# Altium PCB Current Sensor.PcbDoc
Units mil, origin at the board's own origin, x right, y up, seen from the top; angles counter-clockwise.
Board outline 1010 x 690 mil, 2 copper layers (Top Layer, Bottom Layer); 10 components, 8 nets, 30 pads, 8 vias.
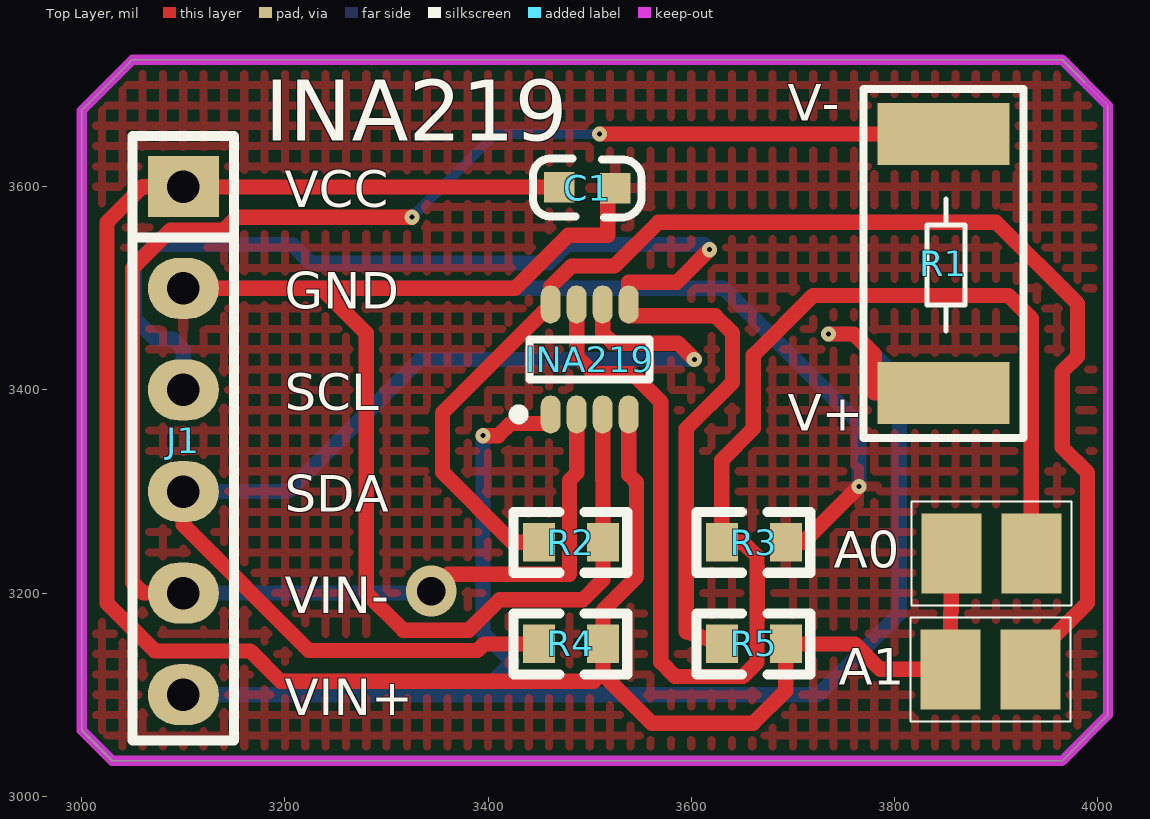
[diagram p0: Top Layer view]
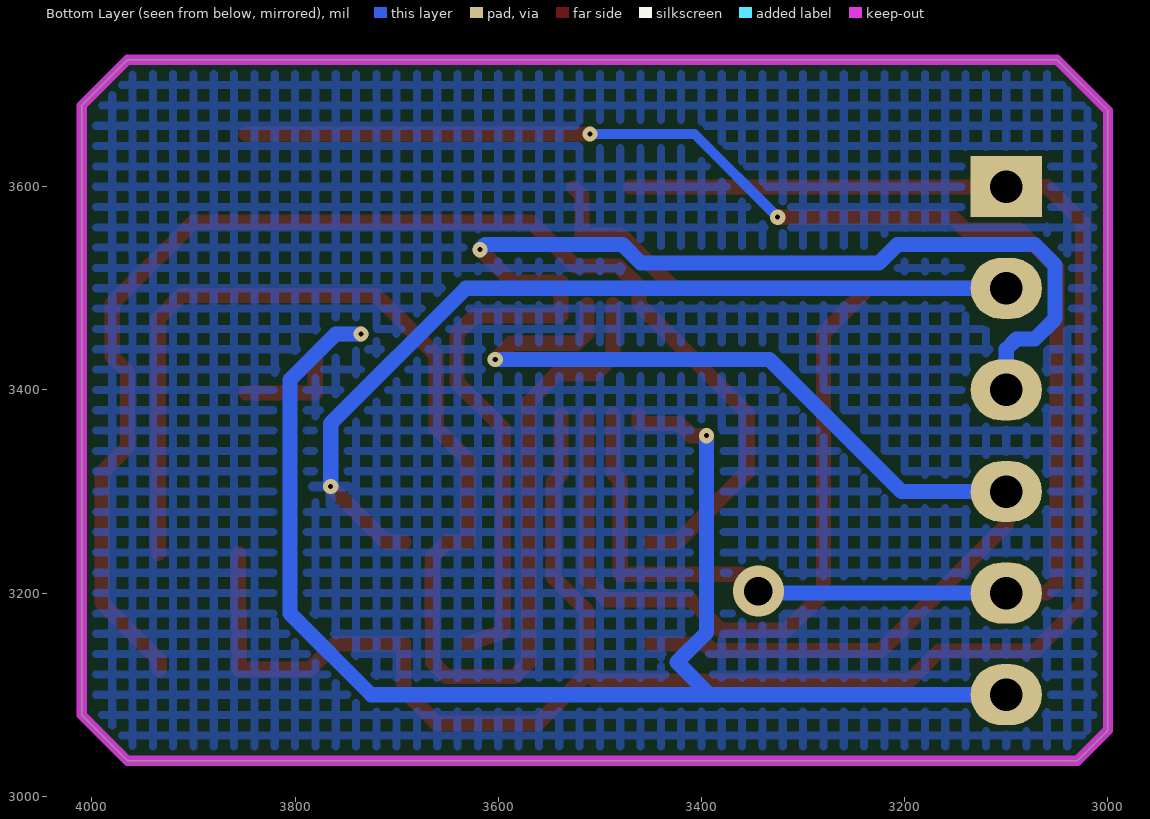
[diagram p1: Bottom Layer view, seen from below]
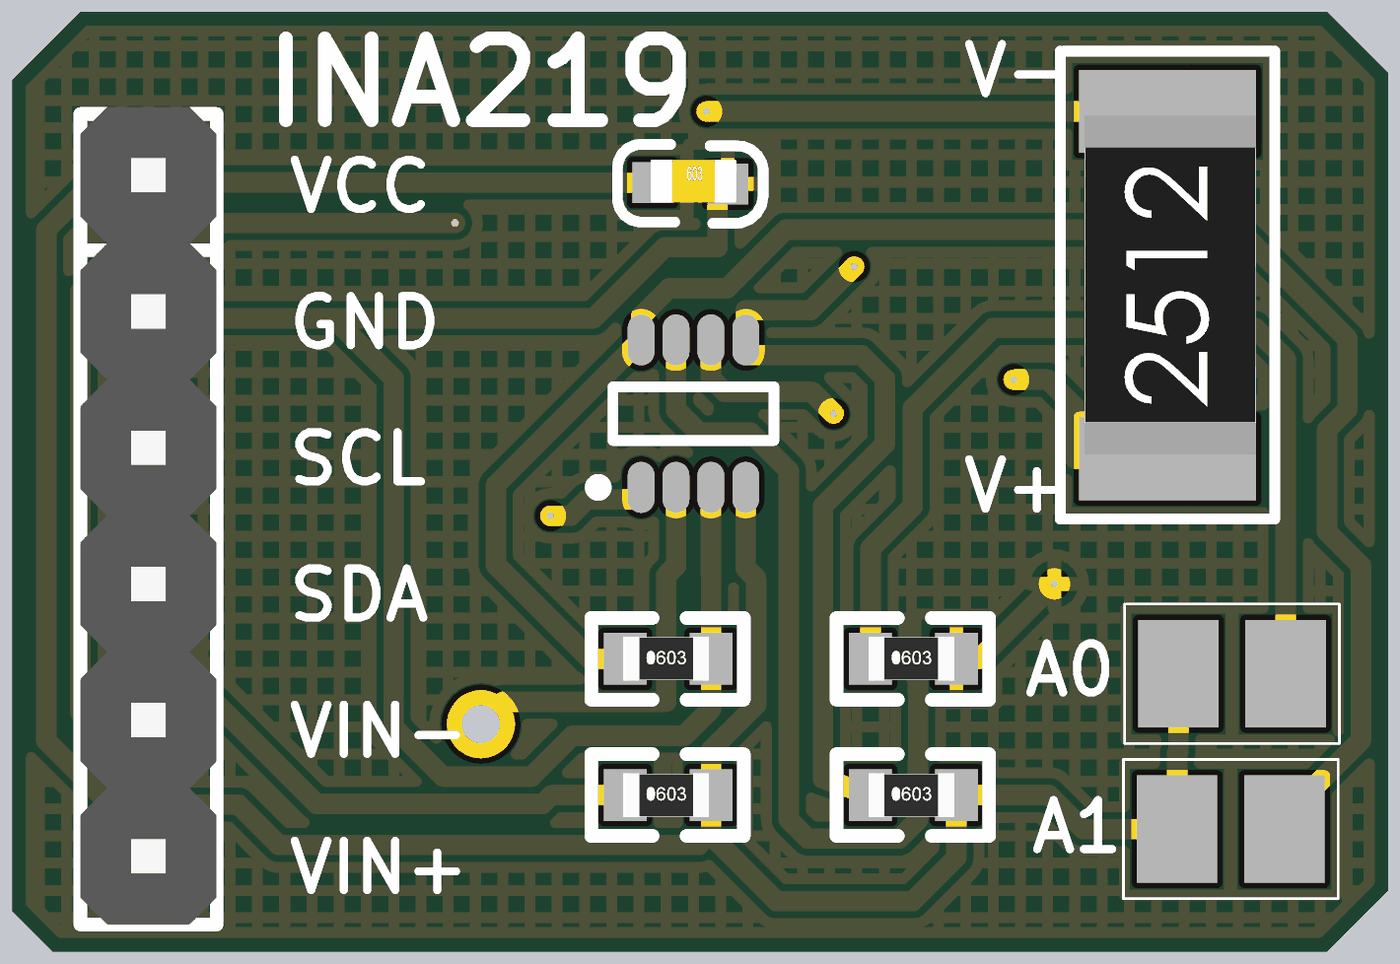
[diagram p2: 3D render of the assembled board from above, using the file's embedded part models]

## Layer stack, top to bottom
Top Solder: solder mask 0.4, Solder Resist, Dk 3.5
Top Layer: signal copper 1.4
Dielectric 1: dielectric 12.6, FR-4, Dk 4.8
Bottom Layer: signal copper 1.4
Bottom Solder: solder mask 0.4, Solder Resist, Dk 3.5

## Board outline
3030,3035 3000,3065 3000,3675 3050,3725 3965,3725 4010,3680 4010,3080 3965,3035

## Design rules (kind name [scope] priority, off if disabled: settings)
Clearance [All] p1: gap=5
PolygonConnect [All] p1: connectstyle=Relief reliefconductorwidth=10 reliefentries=4 polygonreliefangle="90 Angle" airgapwidth=10
RoutingVias [All] p1: holewidth=28 width=50 viastyle="Through Hole" minholewidth=28 minwidth=50 maxholewidth=28 maxwidth=50
SolderMaskExpansion [All] p1: expansion=4
Width [All] p1: maxlimit=25 minlimit=5 preferedwidth=15
30 further rules are at their usual default settings.

## Components (designator, comment, footprint, x,y, rotation, side; value= is the part's Value field where it differs from the comment)
A0 "Switch_0" TSOP65P180X145-2N 3895.31,3239 r0 top
A1 "Switch_1" TSOP65P180X145-2N 3894.37,3125 r0 top
C1 "CAP1uF" 0603C 3470,3600 r0 top
INA219 "INA219" INA219 3500,3430 r90 top
J1 "Pin HDR1X6" "Pin HDR1X6/2.54mm-S" 3100,3600 r0 top
R1 "RES0.1" 2512R 3850,3400 r90 top
R2 "RES10k" 0603R 3450,3250 r0 top
R3 "RES10k" 0603R 3630,3250 r0 top
R4 "RES10k" 0603R 3450,3150 r0 top
R5 "RES10k" 0603R 3630,3150 r0 top

## Footprints (in the part's own frame and the unit in brackets; to place one, negate y for a bottom-side part, rotate by r counter-clockwise, add the part's x,y. Pads: shape width x height; smd on the part's side, far side on the other; paste and mask are expansions set on the pad)
0603C [mil]
  rect 30x30 smd: 1(0.21,-0.35) 2(55.21,-1.35)
  silkscreen extent -26,-30 81,28, body extent -1,-15 62,17, height 12
0603R [mm]
  rect 0.8x0.965 smd: 1(0,0) 2(1.6,0)
  silkscreen extent -0.64,-0.76 2.21,0.76, body extent -0.04,-0.41 1.56,0.41, height 0.45
2512R [mil]
  rect 61x129.92 smd: 1(-3.11,2) 2(251.89,2)
  silkscreen extent -47,-77 296,81, body extent 0,-63 249,63, height 24
INA219 [mm] "TSOP, 8-Leads, Body 2.90x1.60mm, Pitch 0.65mm, IPC Medium Density"
  oval 0.95x0.5 smd: 1(-1.375,0.975) 2(-1.375,0.325) 3(-1.375,-0.325) 4(-1.375,-0.975) 5(1.375,-0.975) 6(1.375,-0.325) 7(1.375,0.325) 8(1.375,0.975)
  silkscreen extent -1.5,-1.5 0.5,1.9, body extent -0.9,-1.5 0.9,1.5, height 1.45
"Pin HDR1X6/2.54mm-S" [mil]
  rect 70x60 hole 32: 1(0,0)
  oval 70x60 hole 32: 2(0,-100) 3(0,-200) 4(0,-300) 5(0,-400) 6(0,-500)
  silkscreen extent -50,-545 50,50, body extent -50,-545 50,55, height 336
TSOP65P180X145-2N [mm] "TSOP, 2-Leads, Body 1.00x0.15mm, Pitch 0.65mm, IPC Medium Density"
  rect 1.5x2 smd: 1(-1,0) 2(1,0)
  silkscreen extent -2,-1.3 2,1.3

## Part data
A0 A1: library part Component_1
C1: library part CAP, "无极性电容"
R1 R2 R3 R4 R5: library part RES

## Via types
v1: diameter 15, hole 5, Top Layer to Bottom Layer, 6 vias
v2: diameter 15, hole 5, Top Layer to Bottom Layer, tented both sides, 1 vias
v3: diameter 50, hole 28, Top Layer to Bottom Layer, 1 vias

## Nets (pads, with @x,y where several pads share a name; then routed paths per layer and width w, separated by ;. In a path a pad name is that pad's centre, name@x,y a point inside that pad or via, vN(x,y) a via of type N, cw(c..) or ccw(c..) an arc to the next point about the centre after c; other vN are vias at no path point)
A0: A0.2 INA219.7 R3.1 | length 1395.7
  Top Layer w15: INA219.7 3487.2,3432.8 3504,3416 3542,3416 3570,3388 3570,3132 3584,3118 3651,3118 3664.74,3131.74 3664.74,3174.17 3665,3174.43 3665,3225.57 3664.74,3225.83 3664.74,3236.26 3651,3250 R3.1 3630,3331 3661,3362 3661,3434.03 3719.86,3492.9 3912.1,3492.9 3934.69,3470.31 A0.2
A1: A1.2 INA219.8 R2.1 | length 1328
  Top Layer w15: R2.1 3424,3250 3355,3319 3355,3377.52 INA219.8 3461.61,3501.61 3482,3522 3524.5,3522 3567.5,3565 3900,3565 3980,3485 3980,3432.86 3965,3417.86 3965,3343.58 3990,3318.58 3990,3190.26 3933.74,3134 A1.2
GND: C1.2 INA219.3 J1.2 R2.2 R3.2 | length 2115.4
  Top Layer w15: J1.2 3236,3500 ; INA219.3 3512.8,3312.2 3512.99,3312 R2.2 3512.99,3213.25 3493.25,3193.5 3411.08,3193.5 3381.08,3163.5 3316.5,3163.5 3280,3200 3280,3456 3236,3500 ; C1.2 3517.71,3591.15 3517.71,3552.15 3478.71,3552.15 3426.57,3500 3236,3500 ; R3.2 3710,3250 v1(3765,3305)
  Bottom Layer w15: J1.2 3632,3500 3765,3367 v1(3765,3305)
SCL: INA219.5 J1.3 R5.1 | length 1329.6
  Top Layer w15: v1(3618,3538) 3586,3506 3538.39,3506 INA219.5 3538.39,3472.93 3623.57,3472.93 3640.5,3456 3640.5,3407.5 3595,3362 3595,3162.07 R5.1
  Bottom Layer w15: J1.3 3100,3440 3090,3450 3072,3450 3052,3470 3052,3523 3072,3543 3207.25,3543 3225.25,3525 3459.75,3525 3477.75,3543 3613,3543 v1(3618,3538)
SDA: INA219.6 J1.4 R4.1 | length 1122.8
  Top Layer w15: J1.4 3100,3267 3223.5,3143.5 3389.5,3143.5 3396,3150 R4.1 ; INA219.6 3512.8,3456 3522.8,3446 3587,3446 v1(3603,3430)
  Bottom Layer w15: J1.4 3203,3300 3333,3430 v1(3603,3430)
VCC: A0.1 A1.1 C1.1 INA219.4 J1.1 R4.2 R5.2 | length 2176.8
  Top Layer w15: C1.1 3285.35,3599.65 J1.1 3060,3600 3025,3565 3025,3190 3072,3143 3166,3143 3195.75,3113.25 3504,3113.25 3512.99,3122.24 ; INA219.4 3538.39,3316.61 3546,3309 3546,3216.01 3512.99,3183 R4.2 3512.99,3122.24 ; A0.1 3855.94,3181.94 3855,3181 A1.1 3786,3125 3761,3150 R5.2 3692.99,3104 3660.99,3072 3560.99,3072 3512.99,3120 3512.99,3122.24
VIN+: INA219.1 J1.6 R1.1 | length 1576.8
  Top Layer w15: v1(3395,3355) 3410,3355 3422,3367 3461.61,3367 INA219.1 ; v1(3735,3455) 3760,3455 3780.11,3434.89 3780.11,3396.89 R1.1
  Bottom Layer w15: J1.6 3392,3100 ; v1(3395,3355) 3395,3161 3424,3132 3392,3100 ; v1(3735,3455) 3760,3455 3805,3410 3805,3180 3725,3100 3392,3100
VIN-: INA219.2 J1.5 R1.2 | length 1764.5
  Top Layer w15: J1.5 3060.5,3200 3050,3210.5 3050,3520 3087.5,3557.5 3140.18,3557.5 3152.68,3570 v2(3325,3570) ; v3(3344,3202) 3360.5,3218.5 3480,3218.5 3480,3311.11 3487.2,3318.31 INA219.2 ; v1(3509.61,3651.89) R1.2
  Bottom Layer w10: v2(3325,3570) 3406.89,3651.89 v1(3509.61,3651.89)
  Bottom Layer w15: J1.5 3342,3200 v3(3344,3202)

## Polygon pours and split planes (outlines as drawn)
GND on Top Layer "Top Layer-No Net" (hatched 90Degree grid 20 track 8, pour order 0): 3050,3725 3965,3725 4010,3680 4010,3080 3965,3035 3030,3035 3000,3065 3000,3675 3050,3725
GND on Bottom Layer "Top Layer-No Net" (hatched 90Degree grid 20 track 8, pour order 4): 3050,3725 3965,3725 4010,3680 4010,3080 3965,3035 3030,3035 3000,3065 3000,3675 3050,3725

## Keep-outs
Keep-Out Layer:
  the board outline again, w10

## Silkscreen, mask and mechanical layers (free items; w line width, h text height)
Top Overlay:
  text "V-" at 3695,3665 h36
  text "INA219" at 3180,3645 h60
  text "VCC" at 3200,3580 h36
  text "GND" at 3200,3480 h36
  text "SCL" at 3200,3380 h36
  text "V+" at 3695,3360 h36
  text "SDA" at 3200,3280 h36
  text "VIN-" at 3200,3180 h36
  text "VIN+" at 3200,3080 h36